# Altium PCB Heater.PcbDoc
Units mil, origin at the board's own origin, x right, y up, seen from the top; angles counter-clockwise.
Board outline 3665 x 3430 mil, 4 copper layers (Top Layer, GND, VCC, Bottom Layer), stack 23.756 mil thick; 83 components, 58 nets, 285 pads, 71 vias.
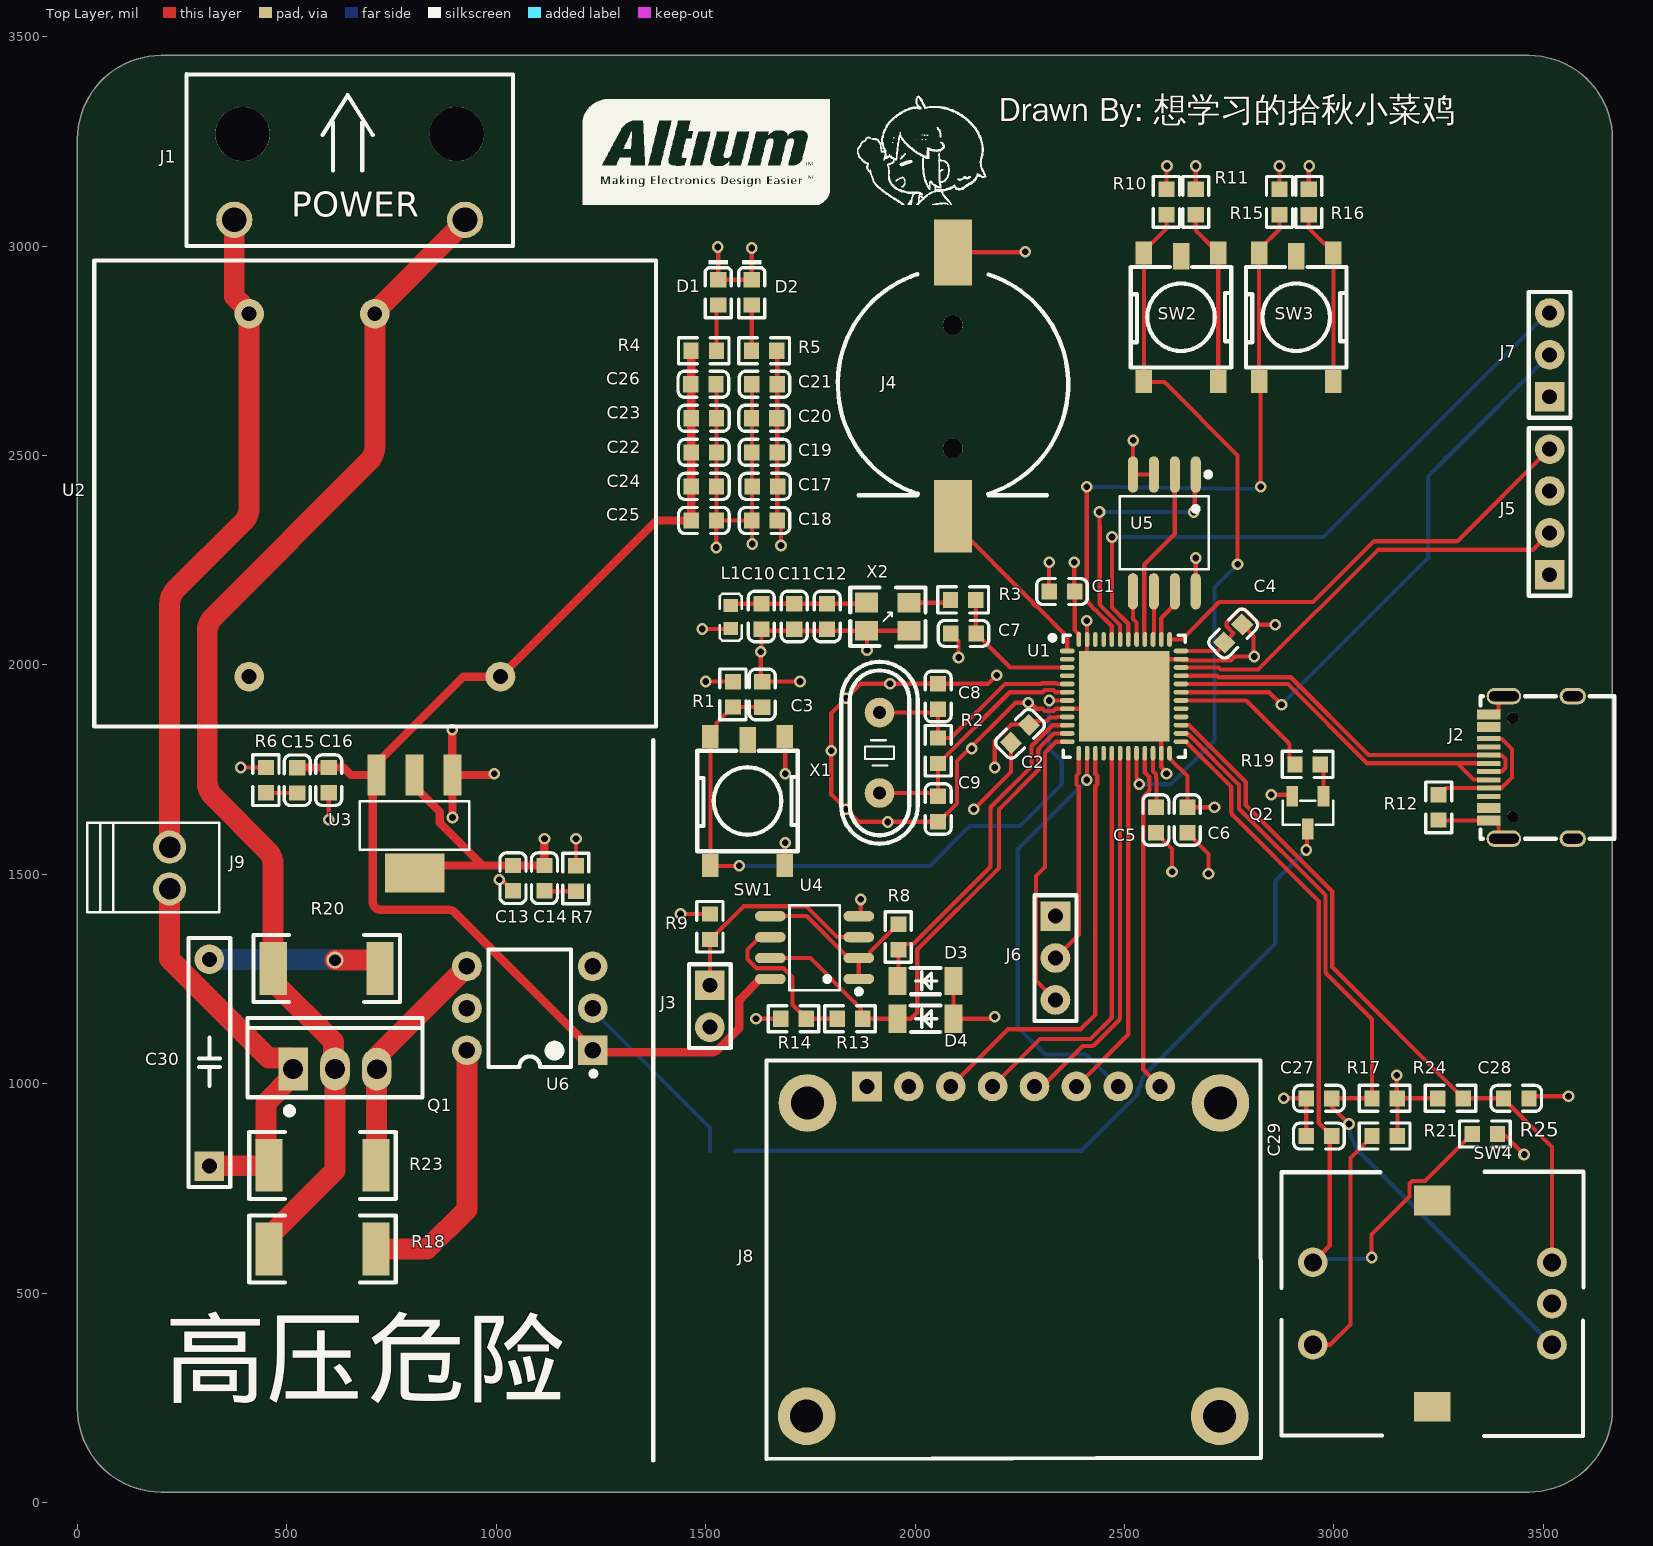
[diagram p0: Top Layer view]
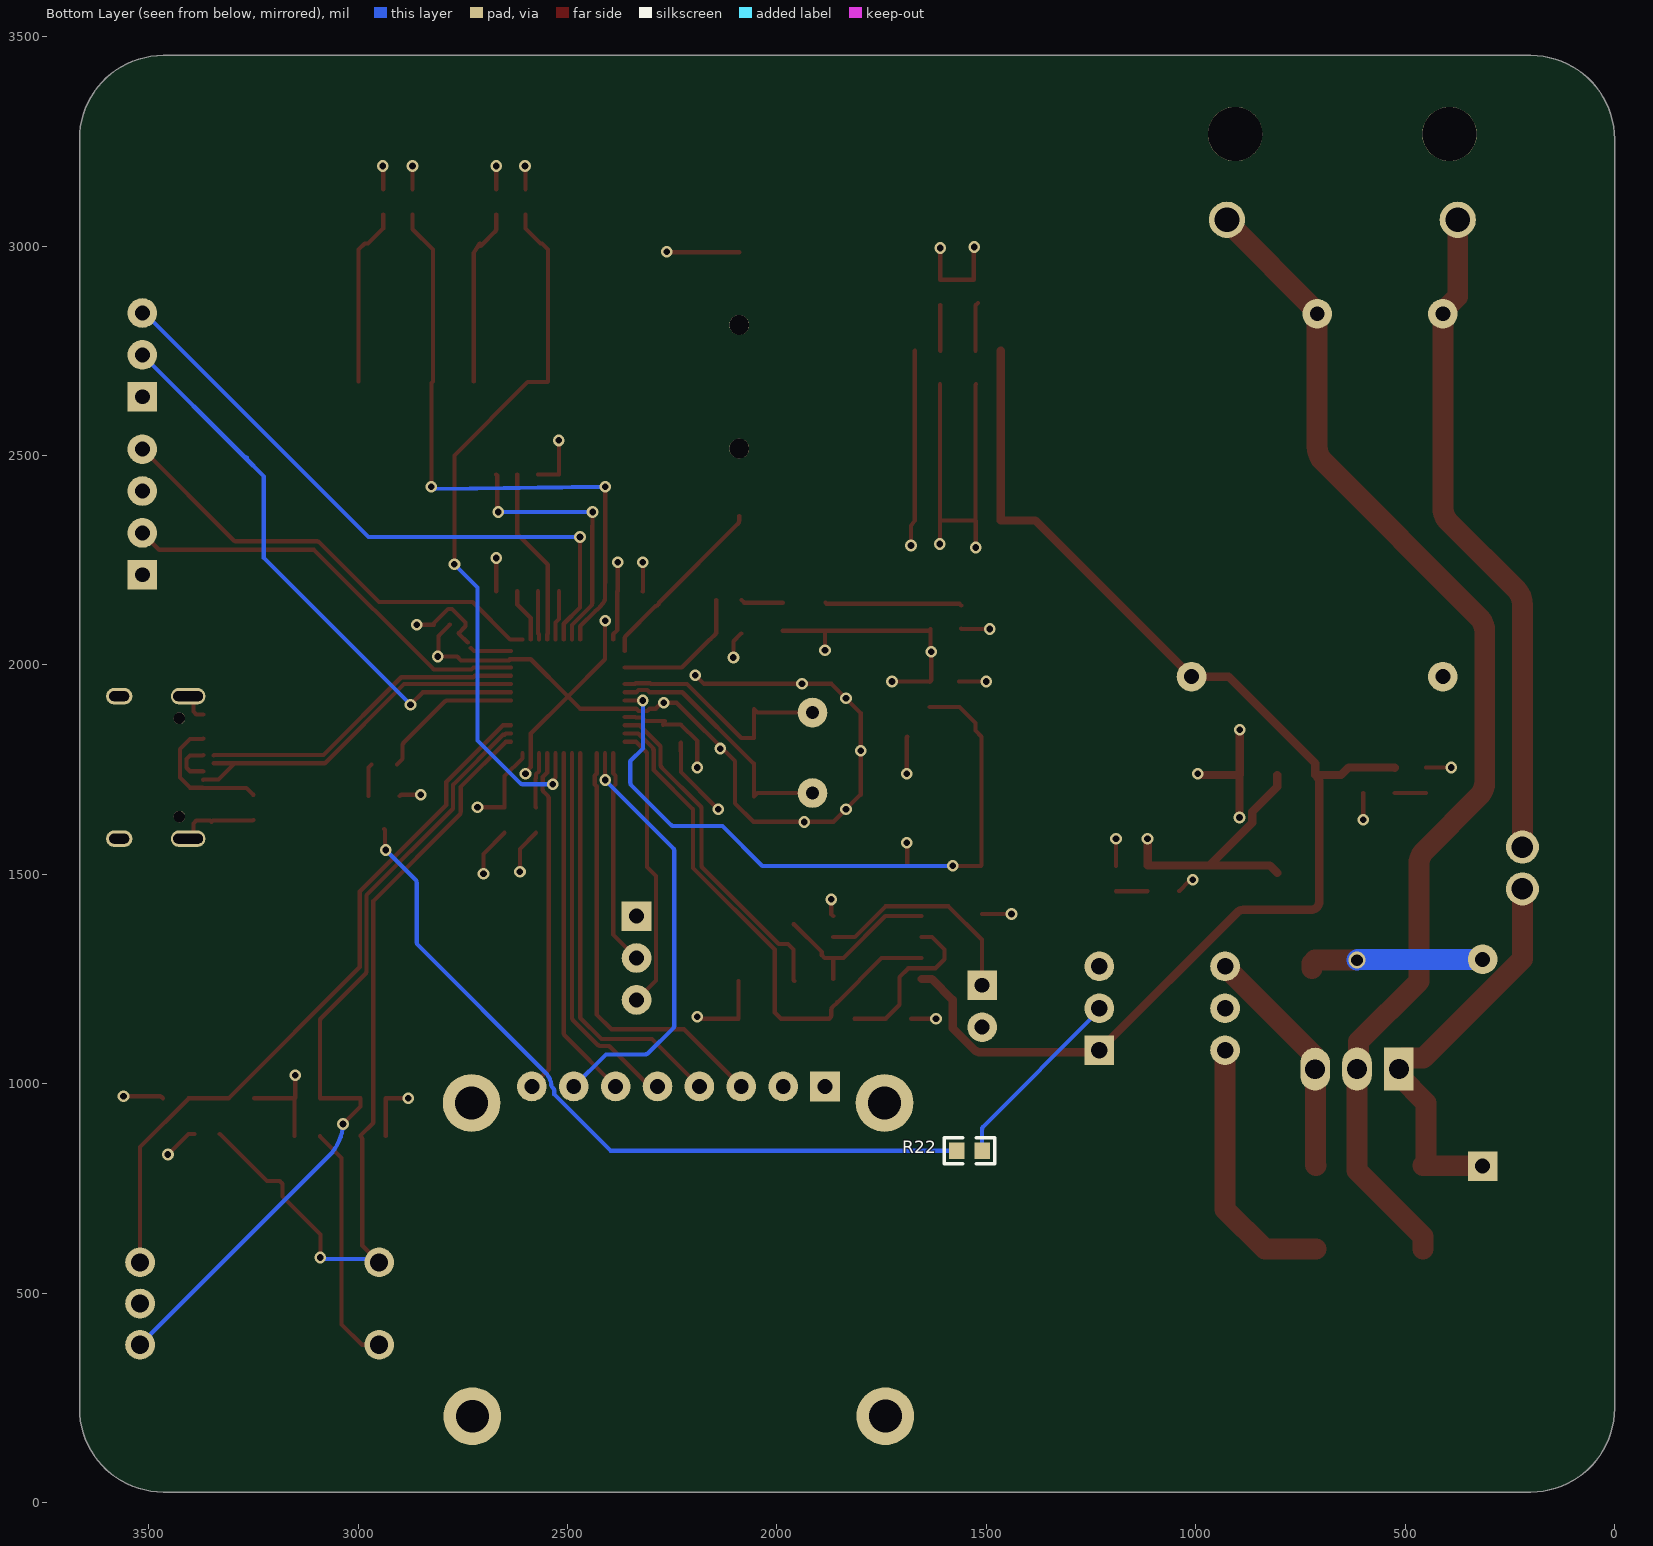
[diagram p1: Bottom Layer view, seen from below]
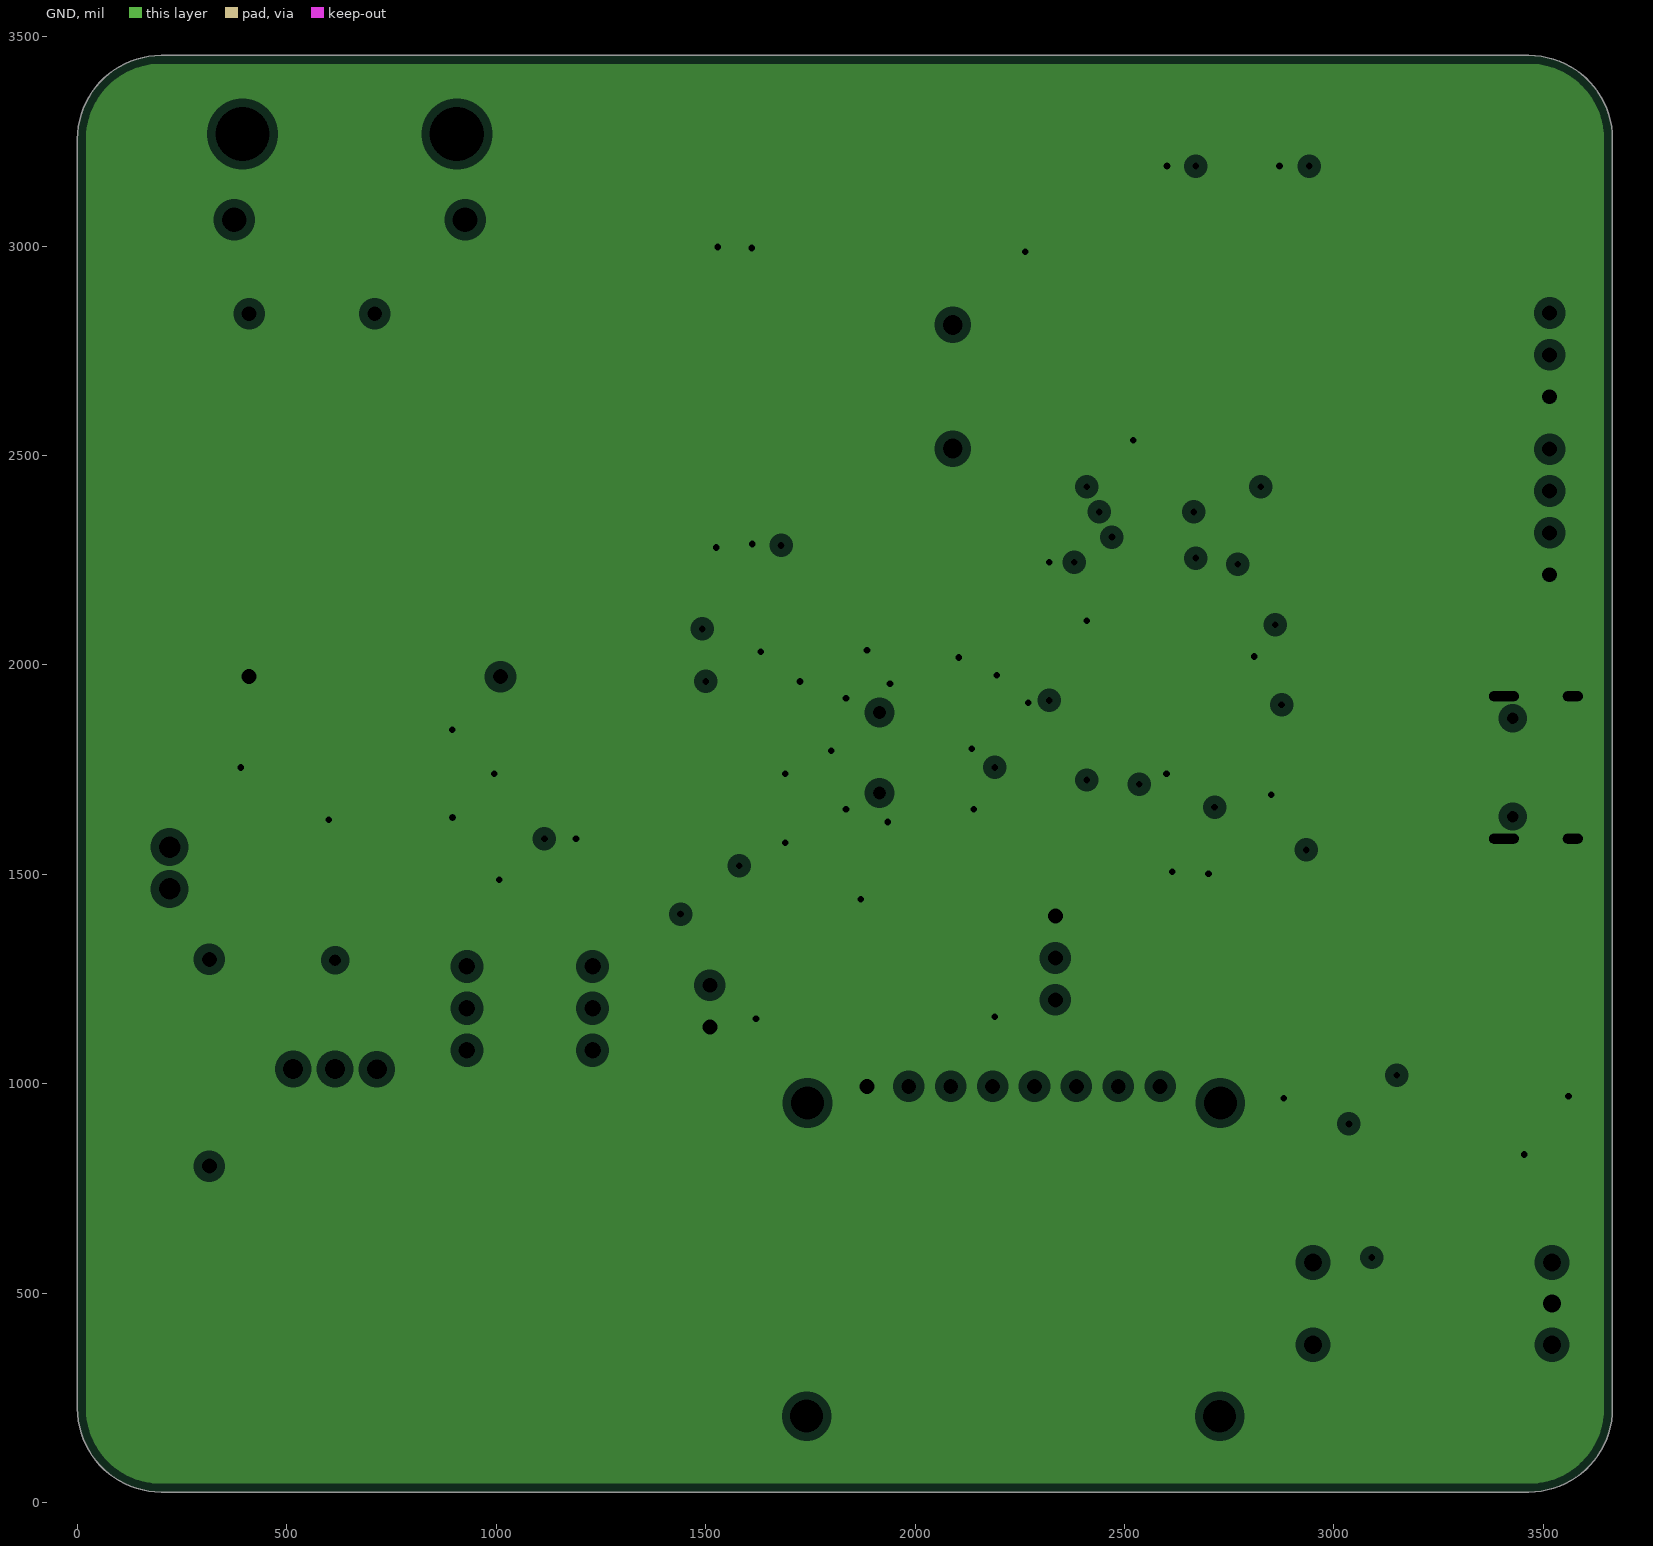
[diagram p2: GND, clearances drawn from the general rule]
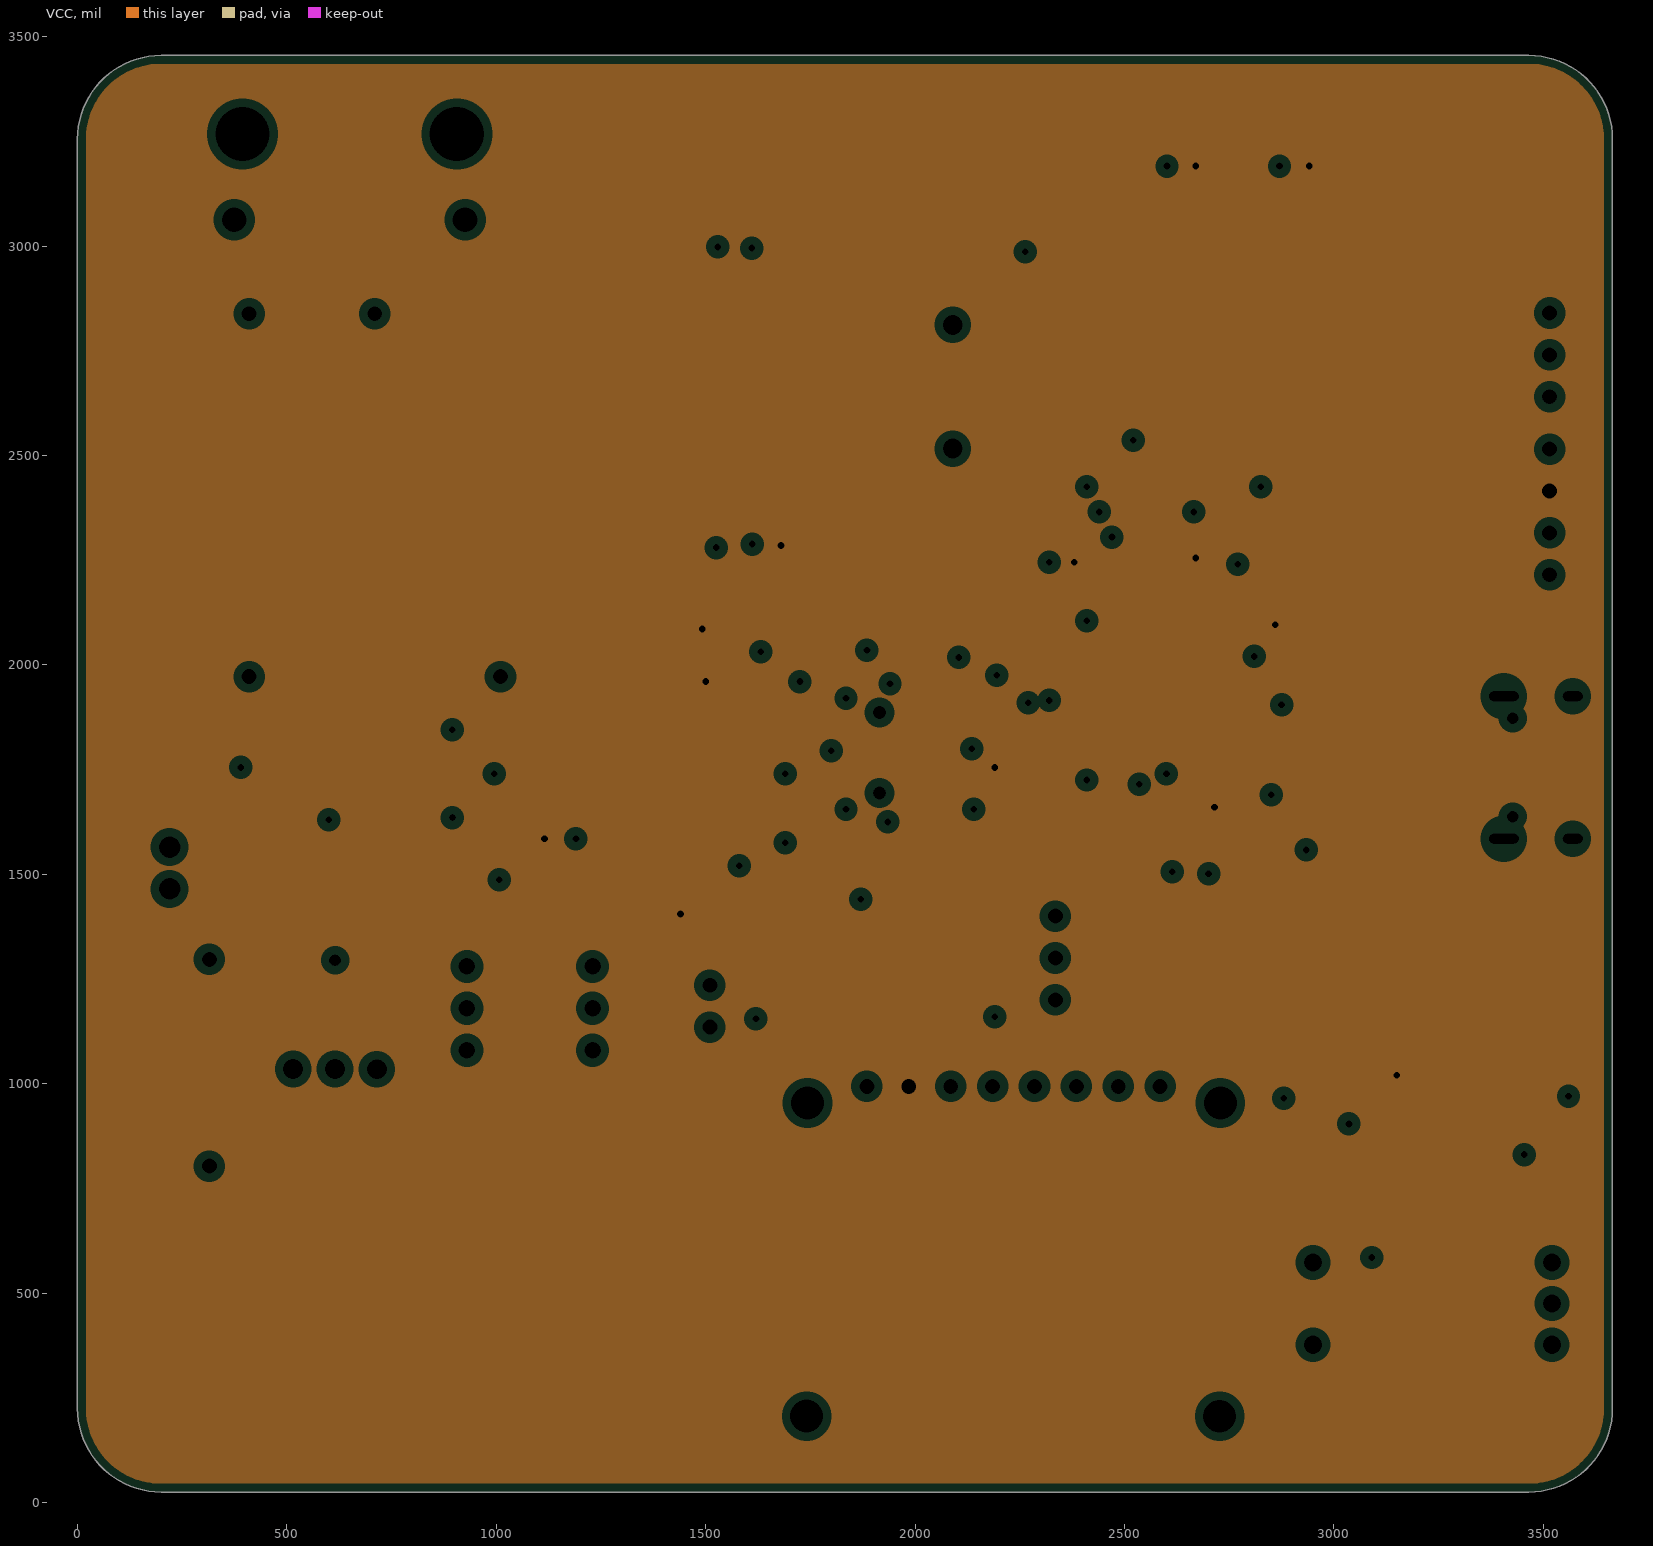
[diagram p3: VCC, clearances drawn from the general rule]
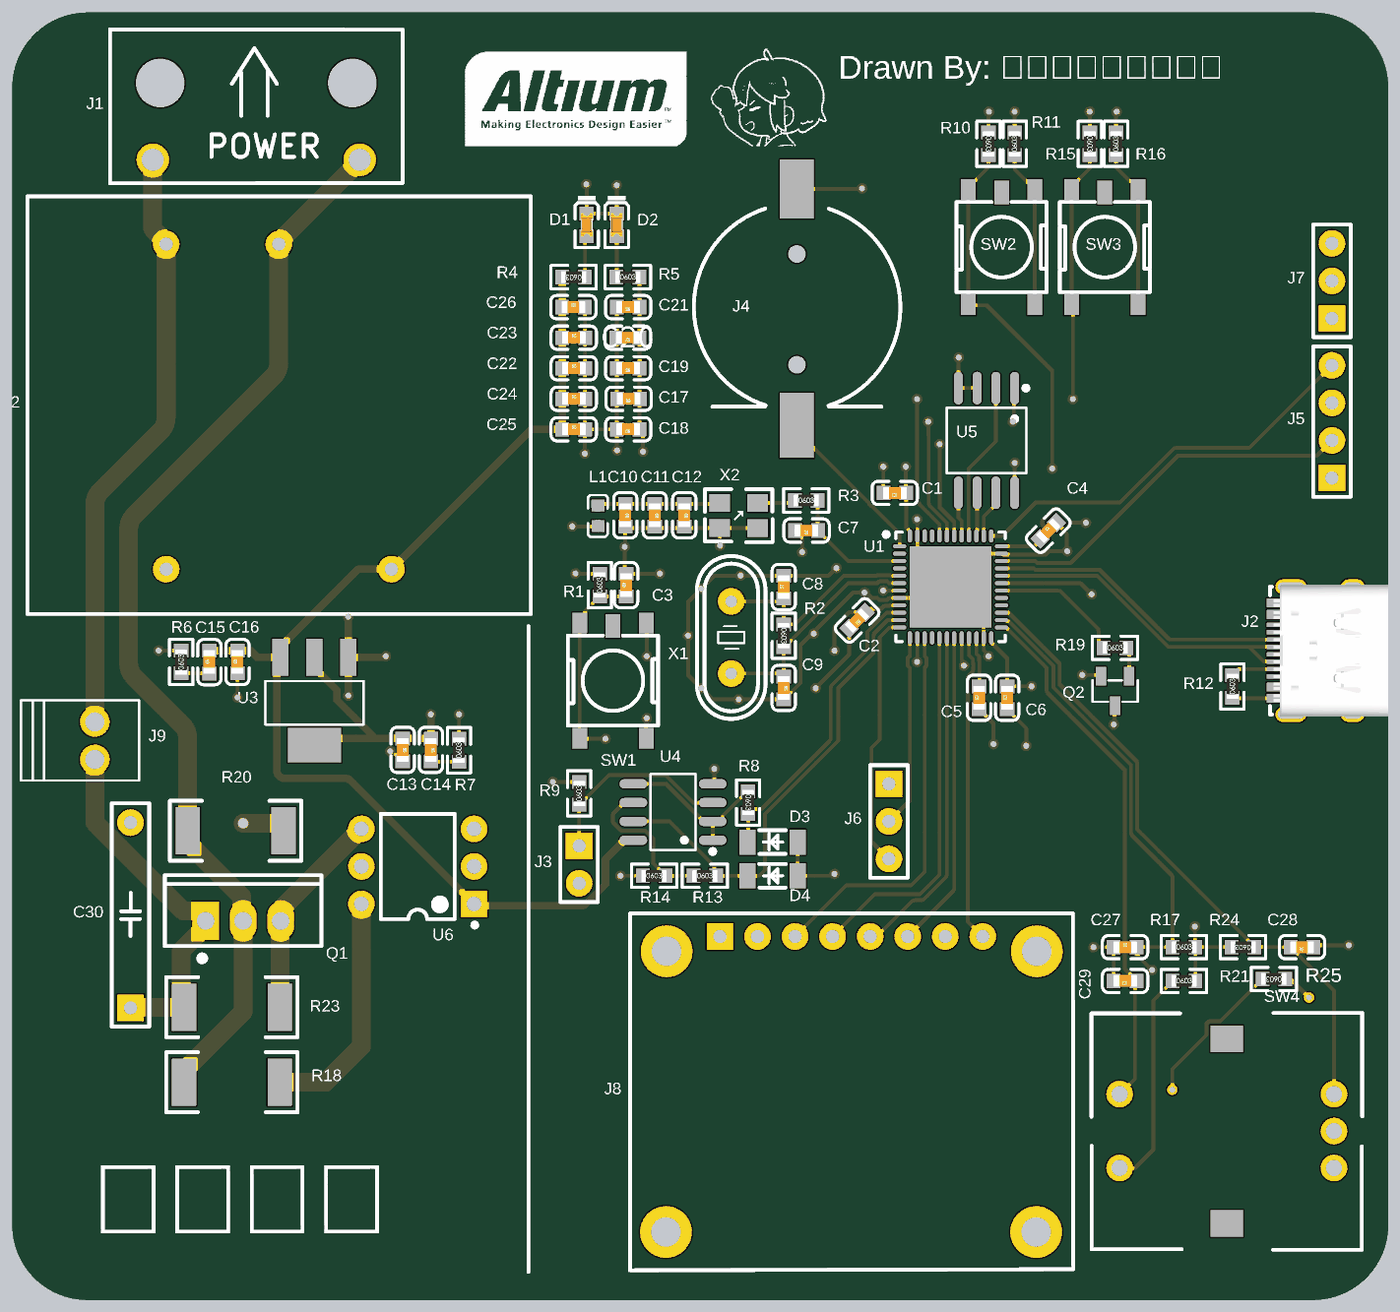
[diagram p4: 3D render of the assembled board from above, using the file's embedded part models]

## Layer stack, top to bottom
Top Solder: solder mask 0.4, Solder Resist, Dk 3.5
Top Layer: signal copper 1.4
Dielectric 2: prepreg 2.8, PP-006, Dk 4.1
GND: plane copper 1.378, net GND
Dielectric 1: dielectric 12.6, FR-4, Dk 4.8
VCC: plane copper 1.378, net +3.3V
Dielectric 3: prepreg 2.8, PP-006, Dk 4.1
Bottom Layer: signal copper 1.4
Bottom Solder: solder mask 0.4, Solder Resist, Dk 3.5

## Board outline
0,225 0,3255 cw(c200,3255) 200,3455 3465,3455 cw(c3465,3255) 3665,3255 3665,225 cw(c3465,225) 3465,25 200,25 cw(c200,225)

## Design rules (kind name [scope] priority, off if disabled: settings)
Clearance [All] p1: gap=6 ignorepadtopadclearanceinfootprint=FALSE
DiffPairsRouting [All] p1: maxlimit=10 minlimit=5 mostfreqgap=10 toplayer_minwidth=5 toplayer_maxwidth=15 toplayer_prefwidth=15 bottomlayer_minwidth=5 bottomlayer_maxwidth=15 bottomlayer_prefwidth=15 maxuncoupledlength=500
HoleSize [All] p1: absolutevalues=TRUE maxlimit=248.03 minlimit=7.87 maxpercent=80.000 minpercent=20.000
MinimumSolderMaskSliver [All] p1: minsoldermaskwidth=0.5
PlaneClearance [All] p1: clearance=20
PlaneConnect [All] p1: planeconnectstyle=Relief reliefexpansion=20 reliefentries=4 reliefconductorwidth=10 reliefairgap=10
PolygonConnect [All] p1: connectstyle=Relief reliefconductorwidth=10 reliefentries=4 polygonreliefangle="90 Angle" airgapwidth=10
RoutingVias [All] p1: holewidth=16 width=28 viastyle="Through Hole" minholewidth=12 minwidth=25 maxholewidth=48 maxwidth=40
SilkToSilkClearance [All] p1: silktosilkclearance=1
SilkToSolderMaskClearance [IsPad] p1: minsilkscreentomaskgap=0.9 clearancetoexposedcopper=TRUE
SolderMaskExpansion [All] p1: expansion=4 istentingtop=FALSE
Width [All] p1: maxlimit=50 minlimit=5 preferedwidth=10
23 further rules are at their usual default settings.

## Components (designator, comment, footprint, x,y, rotation, side; value= is the part's Value field where it differs from the comment)
C1 "100nF" 0603_C 2350,2175 r180 top
C2 "100nF" 0603_C 2250,1835 r225 top
C3 "100nF" 0603_C 1635,1930 r90 top
C4 "100nF" 0603_C 2760,2075 r45 top
C5 "2.2uF" 0603_C 2575,1630 r90 top
C6 "100nF" 0603_C 2650,1630 r90 top
C7 "20pF" 0603_C 2115,2075 r180 top
C8 "20pF" 0603_C 2055,1925 r90 top
C9 "20pF" 0603_C 2055,1655 r270 top
C10 "1uF" 0603_C 1632.89,2115 r270 top
C11 "100nF" 0603_C 1711.44,2115 r270 top
C12 "10nF" 0603_C 1790,2115 r270 top
C13 "100nF" 0603_C 1040,1490 r270 top
C14 "10uF" 0603_C 1115,1490 r270 top
C15 "10uF" 0603_C 525,1725 r90 top
C16 "100nF" 0603_C 600,1725.31 r90 top
C17 "100nF" 0603_C 1641.19,2425.98 r180 top
C18 "100nF" 0603_C 1640,2344.64 r180 top
C19 "100nF" 0603_C 1640,2507.32 r180 top
C20 "100nF" 0603_C 1639.06,2588.66 r180 top
C21 "10uF" 0603_C 1640,2670 r180 top
C22 "100nF" 0603_C 1496.25,2507.32 r0 top
C23 "100nF" 0603_C 1496.25,2588.66 r0 top
C24 "100nF" 0603_C 1496.25,2425.98 r0 top
C25 "100nF" 0603_C 1496.25,2344.64 r0 top
C26 "10uF" 0603_C 1495,2670 r0 top
C27 "10nF" 0603_C 2964.69,965 r0 top
C28 "10nF" 0603_C 3434.69,965 r180 top
C29 "10nF" 0603_C 2963.45,875 r180 top
C30 "10nF,400V" "2PIN - BigCap" 315,1050 r90 top
D1 "LED" 0603_LED 1530,2890 r270 top
D2 "LED" 0603_LED 1610,2890 r270 top
D3 "ZMM2V0" LL-34_L3.5-W1.5-RD 2025,1245 r0 top
D4 "ZMM2V0" LL-34_L3.5-W1.5-RD 2025,1155 r0 top
J1 "2Pin_Power" Power-AC-2Pin 650,3165 r0 top
J2 "Type_C_16Pin" USB-C-SMD_TYPEC-304-BCP16 3470,1755 r90 top
J3 "NTC" 2PIN 1510,1185 r270 top
J4 "BAT_" VBAT 2090,2670 r270 top
J5 "SWD" 4PIN 3515,2365 r90 top
J6 "UART_OUT" 3Pin 2335,1300 r270 top
J7 "UART_OUT" 3Pin 3515,2740 r90 top
J8 "IPS" IPS_8PIN 2235,580 r0 top
J9 "2PIn_To_Heater" CONN-TH_2.54-2P 220,1515 r270 top
L1 "0Ω" L0603 1560,2114.11 r90 top
Q1 "BT138-600E" TO-220-3_L10.0-W4.5-P2.54-L 615,1034.81 r0 top
Q2 "2N7002K_C2931745" SOT-23-3_NMOS 2937.68,1647.32 r90 top
R1 "4.7kΩ" "0603 _R" 1565,1930 r90 top
R2 "1MΩ" "0603 _R" 2055,1794.53 r270 top
R3 "33Ω" "0603 _R" 2115,2155 r0 top
R4 "1kΩ" "0603 _R" 1495,2750 r180 top
R5 "1kΩ" "0603 _R" 1640,2750 r0 top
R6 "1Ω" "0603 _R" 450,1725 r90 top
R7 "1Ω" "0603 _R" 1190,1490 r90 top
R8 "1kΩ" "0603 _R" 1960,1350 r270 top
R9 "130kΩ" "0603 _R" 1510,1375 r90 top
R10 "10kΩ" "0603 _R" 2600,3105 r270 top
R11 "1kΩ" "0603 _R" 2670,3105.63 r90 top
R12 "5.1kΩ" "0603 _R" 3250,1660 r90 top
R13 "20kΩ" "0603 _R" 1845,1155 r0 top
R14 "1kΩ" "0603 _R" 1710,1155 r0 top
R15 "10kΩ" "0603 _R" 2870,3105 r270 top
R16 "1kΩ" "0603 _R" 2940,3105.63 r90 top
R17 "1kΩ" "0603 _R" 3121.47,965 r0 top
R18 "360Ω,2512" 2512_R 585,605 r0 top
R19 "10Ω" "0603 _R" 2937.68,1762.32 r0 top
R20 "39Ω,2512" 2512_R 595,1275 r0 top
R21 "1kΩ" "0603 _R" 3121.47,875 r0 top
R22 "100Ω" "0603 _R" 1540,840 r180 bottom
R23 "360Ω,2512" 2512_R 585,805 r180 top
R24 "1kΩ" "0603 _R" 3277.92,965 r180 top
R25 "10kΩ" "0603 _R" 3360,880 r180 top
SW1 "SW" SW-SMD_5P-L6.4-W6.2-P4.50-LS8.2-TL 1600.01,1674.9 r90 top
SW2 "SW" SW-SMD_5P-L6.4-W6.2-P4.50-LS8.2-TL 2635,2830 r90 top
SW3 "SW" SW-SMD_5P-L6.4-W6.2-P4.50-LS8.2-TL 2910,2830 r90 top
SW4 "EC11" EC11 3235,475 r90 top
U1 "STM32F401CCU6" UFQFPN-48_L7.0-W7.0-P0.50-BL-EP 2499.21,1924.81 r270 top
U2 "AC_DC" AC_TO_DC 710,2405 r270 top
U3 "AMS117-3.3V" SOT-223-3_L6.5-W3.4-P2.30-LS7.0-BR 805,1620 r90 top
U4 "OP" SOP-8_OP 1760,1325 r90 top
U5 "MX25L8006EM2I-12G" SOP-8_L5.3-W5.3-P1.27-LS8.0-BL 2595,2315 r180 top
U6 "MOC3041SR2M" DIP-6_MO 1080,1180 r90 top
X1 "25MHz" "HC-49US_L11.0-W4.6-P4.88 - duplicate" 1915,1790 r270 top
X2 "32768Hz" "OSC 3225" 1935,2115 r0 top

## Footprints (in the part's own frame and the unit in brackets; to place one, negate y for a bottom-side part, rotate by r counter-clockwise, add the part's x,y. Pads: shape width x height; smd on the part's side, far side on the other; paste and mask are expansions set on the pad)
2PIN [mm]
  rect 1.8x1.8 hole 0.9: 1(-1.27,0)
  round 1.8 hole 0.9: 2(1.27,0)
  silkscreen extent -2.54,-1.27 2.54,1.27
"2PIN - BigCap" [mm]
  rect 1.8x1.8 hole 0.9: 1(-6.27,0)
  round 1.8 hole 0.9: 2(6.27,0)
  silkscreen extent -7.54,-1.27 7.57,1.27
3Pin [mm]
  rect 1.8x1.8 hole 0.9: 1(-2.54,0)
  round 1.8 hole 0.9: 2(0,0) 3(2.54,0)
  silkscreen extent -3.81,-1.27 3.81,1.27
4PIN [mm]
  rect 1.8x1.8 hole 0.9: 1(-3.81,0)
  round 1.8 hole 0.9: 2(-1.27,0) 3(1.27,0) 4(3.81,0)
  silkscreen extent -5.08,-1.27 5.08,1.27
"0603 _R" [mm]
  rect 0.93x0.98 smd: 1(-0.778,0) 2(0.762,0)
  silkscreen extent -1.54,-0.79 1.53,0.79, body extent -0.86,-0.4 0.84,0.4, height 0.56
0603_C [mm]
  rect 0.93x0.98 smd: 1(-0.786,0) 2(0.754,0)
  silkscreen extent -1.55,-0.79 1.52,0.79, body extent -0.82,-0.4 0.78,0.4, height 0.3
0603_LED [mm]
  rect 0.93x0.98 smd: A(0.787,0) K(-0.753,0)
  silkscreen extent -1.96,-0.79 1.55,0.79, body extent -0.78,-0.4 0.82,0.4, height 0.6
2512_R [mm]
  rect 1.65x3.2 smd mask+0.102: 1(-3.24,0) 2(3.24,0)
  silkscreen extent -4.44,-2.03 4.44,2.03
AC_TO_DC [mm]
  round 1.8 hole 0.9: 1(-11,-7.62) 2(-11,0) 3(11,-7.62) 4(11,7.62)
  silkscreen extent -14.23,-17.02 14.03,17.05
CONN-TH_2.54-2P [mm]
  round 2 hole 1.3: 1(-1.27,0) 2(1.27,0)
  silkscreen extent -2.73,-5 2.7,3
DIP-6_MO [mm]
  rect 1.8x1.8 hole 1: 1(-2.54,-3.81)
  round 1.8 hole 1: 2(0,-3.81) 3(2.54,-3.81) 4(2.54,3.81) 5(0,3.81) 6(-2.54,3.81)
  silkscreen extent -4.11,-4.01 3.56,2.5
EC11 [mm]
  round 1.8 hole 1.1: 1(-2.5,-7.25) 2(0,-7.25) 3(2.5,-7.25) 4(2.5,7.25) 5(-2.5,7.25)
  rect 1.8x2.2 smd: ""(-6.25,0) ""(6.25,0)
  silkscreen extent -8.04,-9.16 7.99,9.16
"HC-49US_L11.0-W4.6-P4.88 - duplicate" [mm]
  round 1.8 hole 0.8: 1(-2.44,0) 2(2.44,0)
  silkscreen extent -5.51,-2.32 5.51,2.32
IPS_8PIN [mm]
  rect 1.8x1.8 hole 0.9: 1(-8.89,10.5)
  round 1.8 hole 0.9: 2(-6.35,10.5) 3(-3.81,10.5) 4(-1.27,10.5) 5(1.27,10.5) 6(3.81,10.5) 7(6.35,10.5) 8(8.89,10.5)
  round 3.5 hole 2 unplated: ""(-12.544,-9.498) ""(-12.5,9.5) ""(12.5,-9.5) ""(12.544,9.498)
  silkscreen extent -14.98,-12.09 15.01,12.06
L0603 [mm]
  rect 0.8x0.864 smd: 1(-0.7,0) 2(0.7,0)
  silkscreen extent -1.42,-0.65 1.41,0.67
LL-34_L3.5-W1.5-RD [mm]
  rect 1.1x1.7 smd: 1(-1.7,0) 2(1.7,0)
  silkscreen extent -0.9,-0.8 0.9,0.8
"OSC 3225" [mm]
  rect 1.4x1.2 smd mask+0.102: 1(-1.291,-0.848) 2(1.291,-0.852) 3(1.291,0.848) 4(-1.291,0.852)
  silkscreen extent -2.29,-1.8 2.29,1.78
Power-AC-2Pin [mm]
  round 2.2 hole 1.5: 1(-7,-2.6) 2(7,-2.6)
  round 3.3 hole 3.3 unplated: ""(-6.5,2.6) ""(6.5,2.6)
  silkscreen extent -9.9,-4.19 9.91,6.22
SOP-8_L5.3-W5.3-P1.27-LS8.0-BL [mil]
  oval 23.98x86.79 smd: 1(-75,-139.46) 2(-25,-139.46) 3(25,-139.46) 4(75,-139.46) 5(75,139.46) 6(25,139.46) 7(-25,139.46) 8(-75,139.46)
  silkscreen extent -111,-145 106,87
SOP-8_OP [mm]
  oval 0.63x1.865 smd: 1(-1.905,-2.682) 2(-0.635,-2.682) 3(0.635,-2.682) 4(1.905,-2.682) 5(1.905,2.682) 6(0.635,2.682) 7(-0.635,2.682) 8(-1.905,2.682)
  silkscreen extent -2.82,-2.83 2.58,1.52
SOT-23-3_NMOS [mm]
  rect 1.25x0.7 smd: 1(1,-0.95) 2(1,0.95) 3(-1,0)
  silkscreen extent -0.73,-1.53 0.73,1.53
SOT-223-3_L6.5-W3.4-P2.30-LS7.0-BR [mm]
  rect 2.5x1.1 smd: 1(2.97,-2.3) 2(2.97,0) 3(2.97,2.3)
  rect 2.34x3.6 smd: 2(-2.97,0)
  silkscreen extent -1.57,-3.33 1.37,3.33
SW-SMD_5P-L6.4-W6.2-P4.50-LS8.2-TL [mm]
  rect 1.4x1 smd: 1(-3.9,2.25) 1(3.9,2.25) 2(-3.9,-2.25) 2(3.9,-2.25)
  rect 1.6x1 smd: ""(3.7,0)
  silkscreen extent -3.05,-3.05 3.05,3.05
TO-220-3_L10.0-W4.5-P2.54-L [mm]
  rect 1.8x2.6 hole 1.2: 1(-2.54,0.005)
  oval 1.8x2.6 hole 1.2: 2(0,0.005) 3(2.54,-0.005)
  silkscreen extent -5.3,-2.73 5.3,3.09
UFQFPN-48_L7.0-W7.0-P0.50-BL-EP [mm]
  oval 0.28x0.9 smd: 1(-2.751,-3.449) 2(-2.25,-3.449) 3(-1.75,-3.449) 4(-1.25,-3.449) 5(-0.749,-3.449) 6(-0.249,-3.449) 7(0.249,-3.449) 8(0.749,-3.449) 9(1.25,-3.449) 10(1.75,-3.449) 11(2.251,-3.449) 12(2.751,-3.449) 25(2.751,3.449) 26(2.251,3.449) 27(1.75,3.449) 28(1.25,3.449) 29(0.749,3.449) 30(0.249,3.449) 31(-0.249,3.449) 32(-0.749,3.449) 33(-1.25,3.449) 34(-1.75,3.449) 35(-2.25,3.449) 36(-2.751,3.449)
  oval 0.9x0.28 smd: 13(3.449,-2.751) 14(3.449,-2.25) 15(3.449,-1.75) 16(3.449,-1.25) 17(3.449,-0.749) 18(3.449,-0.249) 19(3.449,0.249) 20(3.449,0.749) 21(3.449,1.25) 22(3.449,1.75) 23(3.449,2.25) 24(3.449,2.751) 37(-3.449,2.751) 38(-3.449,2.25) 39(-3.449,1.75) 40(-3.449,1.25) 41(-3.449,0.749) 42(-3.449,0.249) 43(-3.449,-0.249) 44(-3.449,-0.749) 45(-3.449,-1.25) 46(-3.449,-1.75) 47(-3.449,-2.25) 48(-3.449,-2.751)
  rect 5.5x5.5 smd: 49(0,0)
  silkscreen extent -3.7,-4.5 3.7,3.7
USB-C-SMD_TYPEC-304-BCP16 [mm]
  oval 1x2.1 hole 0.6 slot 1.8 at 90 deg: 13(-4.32,1.633) 14(4.32,1.633)
  oval 1x1.6 hole 0.6 slot 1.2 at 90 deg: 15(-4.32,-2.547) 16(4.32,-2.547)
  rect 0.6x1.45 smd: A1B12(-3.225,2.547) A4B9(-2.45,2.547) B1A12(3.22,2.547) B4A9(2.45,2.547)
  rect 0.3x1.45 smd: A5(-1.25,2.547) A6(-0.25,2.547) A7(0.25,2.547) A8(1.25,2.547) B5(1.75,2.547) B6(0.75,2.547) B7(-0.75,2.547) B8(-1.75,2.547)
  round 0.7 hole 0.7 unplated: ""(-2.98,1.102) ""(2.98,1.102)
  silkscreen extent -4.32,-5.08 4.32,3.05, body extent -4.48,-4.95 4.48,2.8, height 3.26
VBAT [mm]
  rect 4.4x2.3 smd mask+0.102: 1(8,0)
  rect 4x2.3 smd mask+0.102: 2(-8,0)
  round 1.2 hole 1.2 unplated: ""(-3.6,0) ""(3.9,0)
  silkscreen extent -6.67,-6.97 6.73,7

## Part data
C1 C2 C3 C4 C5 C6 C7 C8 C9 C10 C11 C12 C13 C14 C15 C16 C17 C18 C19 C20 C21 C22 C23 C24 C25 C26 C27 C28 C29 C30: library part Capacitor
D3 D4: BOM_JLCPCB Part Class="Extended Part", BOM_Manufacturer=SEMTECH, BOM_Manufacturer Part=ZMM2V0, BOM_Supplier=LCSC, BOM_Supplier Part=C8079, spicePre=D, spiceSymbolName=ZMM2V0
L1: BOM_JLCPCB Part Class="Extended Part", BOM_Manufacturer=FH, BOM_Manufacturer Part=CBW160808U000T, BOM_Supplier=LCSC, BOM_Supplier Part=C139173, nameAlias=Value, spicePre=L, spiceSymbolName=CBW160808U000T
Q2: BOM_Manufacturer=Doeshare（德芯), BOM_Manufacturer Part=2N7002K, BOM_Supplier=LCSC, BOM_Supplier Part=C2931745, Contributor=LCSC, spicePre=Q, spiceSymbolName=2N7002K_C2931745
R1 R2 R3 R4 R5 R6 R7 R8 R9 R10 R11 R12 R13 R14 R15 R16 R17 R18 R19 R20 R21 R22 R23 R24 R25: library part Resistor
U3: library part ASM1117-3.3V
U5: BOM_JLCPCB Part Class="Extended Part", BOM_Manufacturer=Micronix, BOM_Manufacturer Part=MX25L8006EM2I-12G, BOM_Supplier=LCSC, BOM_Supplier Part=C71947, spicePre=U, spiceSymbolName=MX25L8006EM2I-12G
X1: library part XTAL-2P, "2脚无源脚晶振", BOM名称=2脚无源脚晶振, 学习资源=www.ooocke.com, 版权归属=源创客
X2: library part XTAL-ACT-4P, "4脚有源晶振", BOM名称=4脚有源晶振, 学习资源=www.ooocke.com, 版权归属=源创客

## Via types
v1: diameter 28, hole 16, Top Layer to Bottom Layer, tented both sides, 68 vias
v2: diameter 28, hole 16, Top Layer to Bottom Layer, 2 vias
v3: diameter 40, hole 28, Top Layer to Bottom Layer, tented both sides, 1 vias

## Nets (pads, with @x,y where several pads share a name; then routed paths per layer and width w, separated by ;. In a path a pad name is that pad's centre, name@x,y a point inside that pad or via, vN(x,y) a via of type N, cw(c..) or ccw(c..) an arc to the next point about the centre after c; other vN are vias at no path point)
+3.3V: C1.1 C2.1 C4.1 C6.2 C13.1 C14.1 C17.1 C18.1 C19.1 C20.1 C21.1 J5.3 J8.2 L1.1 R1.2 R5.2 R9.2 R11.2 R16.2 R17.2 R21.2 R24.2 U1.9 U1.24 U1.36 U1.48 U3.2 U5.8 | length 2737.3
  Top Layer w10: v1(1440,1405) R9.2 ; v1(1491.56,2085.81) 1559.24,2085.81 L1.1 ; v1(1500.21,1960.42) 1500.63,1960 R1.2 ; R5.2 1670.94,2749.06 C19.1 1670.94,2425.98 C18.1 1680,2330.35 v1(1680,2285) ; v1(2190,1755) 2190,1817.84 2229.73,1857.57 2271.18,1857.57 C2.1 ; C2.1@2267.57,1866.18 2313.94,1866.18 2321.76,1874 2336.98,1874 2338.58,1875.6 U1.9 ; v1(2380,2245) 2380,2175.94 C1.1 2380.94,2083.05 2390.91,2073.08 U1.48 ; U1.24 2607.51,1776.8 2650,1734.3 C6.2 2650.31,1660 v1(2715,1660) ; U1.36 2723.1,2033.1 C4.1@2729.04,2039.04 ; U5.8 v1(2670,2255) ; R11.2 v1@2670,3190 ; C4.1@2730,2040 C4.1@2730.98,2040 ; C4.1 2760.27,2075.27 2743.41,2092.14 2743.41,2101.25 2775.74,2133.58 2784.86,2133.58 2818.58,2099.86 2818.58,2095.64 v1(2859.8,2095.64) ; R16.2 v1@2940,3186.89 ; v1@2940,3198.45 v1@2941.33,3199.78 ; v1(3150,1020) 3150,966.47 R17.2 ; R21.2 R17.2 ; R24.2 R17.2
  Top Layer w20: U3.2@805,1503.07 822.87,1520.94 967.21,1520.94 ; U3.2@805,1736.93 805,1709.37 865.29,1649.08 865.29,1622.86 967.21,1520.94 ; v1(1115,1585) C14.1 C13.1 967.21,1520.94
  other v1: 2670,3190.78 2941.33,3190.78
+5V: C15.2 C16.2 C22.1 C23.1 C24.1 C25.1 C26.1 R4.2 U2.4 U3.3 U4.8 U6.1 | length 3136.7
  Top Layer w20: C15.2 525.15,1754.85 599.85,1754.85 C16.2 635,1755 653.07,1736.93 705,1736.93 U3.3 ; R4.2 1465.16,2749.84 1465.16,2344.8 C25.1 1382.72,2344.64 U2.4 921.89,1971.93 714.45,1764.49 U3.3 ; U4.8 1630.08,1250 1580.23,1200.15 1580.23,1132.49 1528.6,1080.86 cw(c1514.45,1095) 1514.45,1075 1255.43,1075 U6.1 900.86,1409.14 ccw(c886.72,1395) 886.72,1415 725,1415 cw(c725,1435) 705,1435 705,1719.19 cw(c725,1719.19) 710.86,1733.34 U3.3
ADC0: D3.1 R8.2 U1.10 | length 811.2
  Top Layer w10: D3.1 1960,1246.93 R8.2 1973.31,1333.31 1995.68,1333.31 2177.07,1514.7 ccw(c2170,1521.77) 2180,1521.77 2180,1655.86 cw(c2190,1655.86) 2182.93,1662.93 2275.11,1755.11 ccw(c2268,1762.14) 2278,1762.14 2278,1805.63 2328.27,1855.9 U1.10
ADC1: D4.1 R13.2 U1.11 U4.7 | length 1261.3
  Top Layer w10: U4.7 1750,1300 1855.73,1194.27 1867.09,1182.91 cw(c1860,1175.86) 1870,1175.86 1870,1164.14 ccw(c1880,1164.14) 1872.93,1157.07 R13.2 D4.1 1990,1155 2005,1170 2005,1320 2200,1515 2200,1655 2294,1749 2294,1796.63 2295,1797.63 2295,1800 2331,1836 2363.2,1836 U1.11
BOOT0: R15.2 SW3.1 U1.44 | length 1476.3
  Top Layer w10: v1(2410,2425) 2410,2197.44 ccw(c2420,2197.48) 2410.11,2196 cw(c2399.24,2194.29) 2410.24,2194.29 2410.24,2158.42 ccw(c2420.24,2158.47) 2411.55,2153.53 2411.57,2153.48 ccw(c2487.03,2196.85) 2434.03,2127.82 2469.71,2092.14 U1.44 ; v1(2825,2425) 2825,2672.87 2821.41,2676.46 2821.41,2983.54 2821.41,2991.42 2870,3040 R15.2
  Bottom Layer w10: v1(2410,2425) 2815.76,2420.05 ccw(c2815.91,2430.05) 2822.98,2422.98 v1(2825,2425)
BOOT1: R10.2 SW2.1 U1.20 | length 1721.4
  Top Layer w10: U1.20 2528.71,1730.26 2531.6,1727.36 cw(c2524.53,1720.29) 2534.5,1721.11 v1(2535,1715) ; R10.2 2600,3041.69 2564.41,3006.1 2561.1,3006.1 2546.41,2991.42 2546.41,2983.54 2546.41,2676.46 2547.87,2675 2595,2675 2770,2500 v1(2770,2240)
  Bottom Layer w10: v1(2535,1715) 2606.21,1715 ccw(c2606.21,1725) 2613.28,1717.93 2715,1819.64 2715,2185 v1(2770,2240)
EC11_A: C27.2 R17.1 SW4.1 U1.26 | length 1966.3
  Top Layer w10: U1.26 2647.48,1836.2 2650.67,1833.01 2654.04,1833.01 2773.52,1713.53 2773.52,1656.48 2979.94,1450.06 2979.94,1269.14 ccw(c2989.94,1269.21) 2982.82,1262.18 3087.91,1157.09 cw(c3080.84,1150.02) 3090.84,1150.06 ; v1(3035.76,903.9) 2994.39,945.27 C27.2 R17.1 3090.84,1150.02
  Bottom Layer w10: v1(3035.76,903.9) ccw(c3150.67,909.01) 3068.8,828.21 SW4.1
EC11_C: C28.2 R24.1 SW4.3 U1.27 | length 1716.7
  Top Layer w10: U1.27 2635.2,1855.7 2653.98,1855.7 2789.52,1720.16 2789.52,1665.48 2995.94,1459.06 2995.94,1278.6 3308.55,965.98 R24.1 C28.2 3405,964.02 3520.43,848.58 SW4.3
EC11_SW: C29.1 R25.2 SW4.4 U1.25 | length 1974.2
  Top Layer w10: U1.25 2647.2,1816.5 2755,1708.7 2755,1649.14 ccw(c2765,1649.14) 2757.91,1642.09 2963.55,1436.45 2963.55,906.82 2994.39,875.98 C29.1 2992.93,873.54 ccw(c3000,866.47) 2990,866.47 2990,613.86 SW4.4 ; v2(3090,585) 3090,640 3180.69,730.69 3180.69,761.05 3187.14,767.5 3217.5,767.5 R25.2
  Bottom Layer w10: SW4.4 2957.7,581.56 3086.56,581.56 v2(3090,585)
Flash_CLK: U1.39 U5.6 | length 115.7
  Top Layer w10: U1.39 2568.11,2073.08 2570,2074.98 U5.6
Flash_CS: U1.43 U5.1 | length 640.5
  Top Layer w10: v1(2440,2365) 2441,2303.53 cw(c2425,2303.27) 2441,2303.27 2441.03,2147.59 ccw(c2451.03,2147.59) 2443.92,2140.56 ; 2443.93,2140.55 2489.41,2095.07 U1.43 ; v1(2665,2365) 2667.5,2367.5 2667.5,2451.96 U5.1
  Bottom Layer w10: v1(2440,2365) v1(2665,2365)
Flash_Hold: U1.38 U5.7 | length 128.3
  Top Layer w10: U1.38 2587.81,2111.94 2620,2144.13 U5.7
Flash_MISO: U1.40 U5.2 | length 424.7
  Top Layer w10: U1.40 2548.41,2073.08 2547.01,2074.48 2547.01,2239.11 2620,2312.1 U5.2
Flash_MOSI: U1.41 U5.5 | length 118.5
  Top Layer w10: U5.5 2520,2109.73 2528.71,2101.03 U1.41
GND: C1.2 C2.2 C3.2 C4.2 C5.1 C6.1 C7.2 C8.2 C9.2 C10.2 C11.2 C12.2 C13.2 C16.1 C17.2 C18.2 C19.2 C20.2 C21.2 C22.2 C23.2 C24.2 C25.2 C26.2 C27.1 C28.1 C29.2 D1.K D2.K D3.2 D4.2 J2.13 J2.14 J2.15 J2.16 J2.A1B12 J2.B1A12 J3.2 J4.2 J5.1 J6.1 J7.1 J8.1 Q2.2 R6.2 R7.2 R10.1 R12.1 R14.1 R15.1 R25.1 SW1.2 SW4.2 U1.8 U1.23 U1.35 U1.47 U1.49 U2.3 U3.1 U4.4 U5.3 U5.4 X2.1 X2.2 | length 6730.3
  Top Layer w10: v1(390,1755) R6.2 ; v1(600,1630) C16.1 ; v1(1006.9,1486.9) 1010.35,1483.46 1015.87,1483.46 1039.02,1460.31 C13.2 ; R7.2 1190,1584.79 v1(1190.2,1584.99) ; C26.2 1525.94,2668.75 C23.2 C22.2 C24.2 C25.2 ; v1(1525,2280) 1525,2343.7 C25.2 ; v1(1529.03,2997.71) 1530,2996.74 D1.K D2.K v1(1610,2995) ; C21.2 C19.2 C18.2 ; v1(1611.22,2288.33) 1610.31,2289.25 C18.2 ; v1(1620,1155) 1666.06,1155 R14.1 ; SW1.2@1688.59,1521.36 1688.59,1573.59 v1(1690,1575) ; SW1.2@1688.59,1828.44 1690,1827.03 v1(1690,1740) ; v1(1725,1960) 1635.31,1960 C3.2 1631.36,1963.34 v1(1631.36,2031.52) 1632.89,2033.05 C10.2 1636.59,2081.6 X2.1 X2.1@1884.32,2081.47 ; U4.4 1870,1404.39 v1(1870,1440) ; v1(1885,2035) 1885,2080.79 X2.1@1884.32,2081.47 ; X2.2 X2.1@1884.32,2081.47 ; C7.2 2103.85,2056.45 v1(2103.85,2017.71) ; J4.2 2261.82,2984.96 v1(2263.25,2986.39) ; D3.2 D4.2 2185,1155 v1(2190,1160) ; v1(2140,1655) 2229,1744 2229,1793.79 2229.7,1794.49 2229.7,1813.31 C2.2 ; v1(2195,1975) 2194.6,1975 2174.3,1954.69 C8.2 1869.69,1954.69 1800,1885 1800,1690 1864.69,1625.31 C9.2 2055.98,1625.31 2100,1669.32 2100,1770 2239.6,1909.6 v1(2270,1909.6) 2274.87,1909.6 2289.17,1895.3 2304.34,1895.3 2309.64,1890 2330.36,1890 2335.66,1895.3 U1.8 2469.71,1895.3 U1.49 ; v1(2320,2245) 2320,2175.31 C1.2 ; v1(2410,2105) 2410.61,2104.39 U1.47 2410.61,2013.4 U1.49 ; v1(2521.06,2535.89) 2520,2534.83 U5.4 U5.3 ; C5.1 2613.59,1560.47 v1(2613.59,1505.86) ; v1(2600,1740) 2600,1744.09 2587.81,1756.28 U1.23 2587.81,1836.2 U1.49 ; R10.1 v1@2600,3189.35 ; v1@2600,3198.35 v1@2601.43,3199.78 ; C6.1 2700.71,1548.35 v1(2700.71,1501.14) ; C4.2 2781.68,2095.32 2805.38,2071.61 cw(c2798.3,2064.55) 2808.3,2064.55 2808.3,2025.54 ccw(c2818.3,2025.58) v1(2810,2020) 2763.15,2020 2753.85,2010.69 2641.8,2010.69 cw(c2641.84,2020.69) 2637.71,2011.59 2637.71,2013.4 U1.35 2587.81,2013.4 U1.49 ; v1(2850,1690) 2896.97,1690 Q2.2 ; R15.1 v1@2870,3185 ; v1(2880,965) C27.1 C29.2 ; R12.1 3251.34,1628.03 3346.97,1628.03 3350,1625 3353.03,1628.03 J2.A1B12 3386.44,1628.03 3393.25,1621.22 3393.25,1597.4 J2.13 ; J2.B1A12 3386.44,1881.77 3393.25,1888.58 3393.25,1912.6 J2.14 ; R25.1 3404.76,880 v2(3454.01,830.76) ; C28.1 3467.7,967.07 cw(c3474.77,960) 3474.77,970 v1(3560,970) ; C25.2 C18.2
  Top Layer w20: v1(895,1845) 895.28,1844.72 895.28,1737.2 U3.1 ; v1(895.29,1635.29) 895.42,1635.42 895.42,1736.8 U3.1 ; v1(995,1740) 991.93,1736.93 U3.1
  other v1: 1935,1625 1835,1655 1800,1795 2135,1800 1835,1920 1940,1955 2601.43,3190.78 2870,3190.78
IPS_BLK: J8.8 U1.21 | length 822
  Top Layer w10: U1.21 2548.41,1742.88 2559,1732.29 2559,1723.02 2559.65,1719.16 cw(c2535,1715) 2559.95,1713.43 2559.28,1702.82 cw(c2549.3,1703.44) 2556.39,1696.39 2547.6,1687.6 ccw(c2554.71,1680.57) 2544.71,1680.61 2544.71,1033.68 J8.8
IPS_CS: J8.7 U1.14 | length 1020
  Top Layer w10: v1(2410,1725) 2410.61,1725.61 U1.14
  Bottom Layer w10: v1(2410,1725) 2247.89,1562.89 ccw(c2255,1555.86) 2245,1555.9 2245,1139.08 ccw(c2255,1139.14) 2247.88,1132.12 2307.11,1072.89 ccw(c2314.14,1080) 2314.08,1070 2408.39,1070 J8.7
IPS_DC: J8.6 U1.19 | length 846.5
  Top Layer w10: J8.6 2506.11,1114.5 ccw(c2499.01,1121.53) 2509.01,1121.53 U1.19
IPS_MOSI: J8.4 U1.17 | length 984.3
  Top Layer w10: J8.4 2297.93,1106.31 2418.69,1106.31 2469.71,1157.33 U1.17
IPS_RES: J8.5 U1.18 | length 904
  Top Layer w10: J8.5 2299.24,993.39 ccw(c2299.24,1003.39) 2306.29,996.29 2397.09,1087.09 cw(c2404.14,1080) 2404.1,1090 ; 2404.14,1090 2420.86,1090 ccw(c2420.86,1100) 2427.91,1092.91 2486.51,1151.51 ccw(c2479.41,1158.55) 2489.41,1158.55 U1.18
IPS_SCK: J8.3 U1.15 | length 1044.1
  Top Layer w10: J8.3 2221.61,1130 2395,1130 2430.31,1165.31 2430.31,1709.95 2435,1714.64 2435,1735.36 2430.31,1740.05 U1.15
L: J1.2 Q1.2 R18.1 R20.1 U2.2 | length 2895.6
  Top Layer w50: R18.1 457.44,635.51 615,793.07 Q1.2 611.01,1038.99 611.01,1100.92 467.44,1244.49 R20.1 467.44,1521.85 ccw(c417.44,1521.85) 452.87,1557.13 324.55,1685.45 cw(c360,1720.71) 310,1720.57 310,2079.29 cw(c360,2079.29) 324.64,2114.64 695.44,2485.44 ccw(c660,2520.71) 710,2520.71 U2.2 710,2842.56 925.59,3058.15 J1.2
N: J1.1 J9.1 U2.1 | length 1586.8
  Top Layer w50: J9.1 220,2144.39 cw(c270,2144.29) 234.56,2179.56 395.44,2340.44 ccw(c360,2375.71) 410,2375.71 U2.1 410,2843.72 374.41,2879.31 J1.1
NetC5_2: C5.2 U1.22 | length 133
  Top Layer w10: U1.22 2568.11,1745.81 2575,1738.92 2575,1729.64 2576,1728.64 2576,1660.69 C5.2
NetC10_1: C10.1 C11.1 C12.1 L1.2 X2.4 | length 327
  Top Layer w10: L1.2 1564.26,2145.94 C10.1 C12.1 1881.59,2145.94 X2.4
NetC14_2: C14.2 R7.1 | length 75.4
  Top Layer w10: C14.2 1115.94,1459.37 R7.1
NetC15_1: C15.1 R6.1 | length 75.1
  Top Layer w10: R6.1 524.69,1694.37 C15.1
NetC30_1: C30.1 J9.2 Q1.1 R23.2 | length 983.4
  Top Layer w50: J9.2 220,1297.9 456.72,1061.18 504.57,1061.18 515,1050.75 Q1.1 515,1019.25 450,954.25 450,812.44 R23.2 456.52,804.07 315.93,804.07 C30.1
NetC30_2: C30.2 R20.2 | length 423.9
  Top Layer w50: v3(615,1295) 715.08,1295 722.56,1287.52 R20.2
  Bottom Layer w50: C30.2 613.15,1296.85 v3(615,1295)
NetD1_A: D1.A R4.1 | length 116.3
  Top Layer w10: D1.A@1520,2864 1525.63,2858.37 R4.1
NetD2_A: D2.A R5.1 | length 109.3
  Top Layer w10: R5.1 1610,2750.63 D2.A
NetJ2_A5: J2.A5 J2.B5 R12.2 | length 325.9
  Top Layer w10: R12.2 3250.98,1690 3266.77,1705.79 J2.A5 3370.63,1706.69 3400.93,1706.69 3425.25,1731.01 3425.25,1798.67 3400.93,1822.99 3370.61,1822.99 J2.B5
NetJ3_1: J3.1 R9.1 U4.3 | length 528.1
  Top Layer w10: J3.1 R9.1 1510.98,1344.37 1590.02,1423.4 1740.52,1423.4 1813.93,1350 U4.3
NetQ1_3: Q1.3 R23.1 U6.4 | length 565.1
  Top Layer w50: R23.1 713.78,806.22 713.78,1033.39 Q1.3 718.99,1038.6 718.99,1068.99 U6.4
NetQ2_1: Q2.1 R19.2 | length 78.7
  Top Layer w10: R19.2 2975.08,1754.92 Q2.1
NetQ2_3: Q2.3 R22.1 | length 1814.8
  Top Layer w10: v1(2933.91,1557.98) 2935.79,1559.86 2935.79,1606.07 Q2.3
  Bottom Layer w10: R22.1 2397.28,840 2531.43,974.15 2531.43,982.34 cw(c2541.43,982.29) 2534.33,989.33 2535.85,990.85 ccw(c2528.75,997.89) 2538.71,997.06 cw(c2585,993.39) 2552.14,1026.19 2857.09,1331.14 ccw(c2850,1338.19) 2860,1338.19 2860,1479.93 cw(c2870,1479.93) 2862.93,1487 v1(2933.91,1557.98)
NetR3_1: R3.1 X2.3 | length 101.3
  Top Layer w10: X2.3 2077.77,2148.4 R3.1
NetR8_1: R8.1 U4.1 U4.2 U4.5 | length 434.8
  Top Layer w10: U4.5 1741.3,1400 1841.3,1300 U4.2 ; U4.1 U4.2 ; R8.1 1959.02,1380.63 1892.75,1314.37 1892.75,1306.84 1885.92,1300 U4.2
NetR11_1: R11.1 SW2.2 | length 431.5
  Top Layer w10: R11.1 2670,3041.2 ccw(c2680,3041.26) 2672.89,3034.23 2704.68,3002.45 ccw(c2711.68,3009.59) 2708.9,2999.98 2708.89,3006.1 2723.58,2983.54 SW2.2@2723.58,2676.46
NetR13_1: R13.1 R14.2 U4.6 | length 402.1
  Top Layer w10: U4.6 1630,1350 1600,1320 1600,1296.98 1621.37,1275.62 1686.18,1275.62 1707.54,1254.25 1707.54,1188.44 1740,1155.98 R14.2 R13.1
NetR16_1: R16.1 SW3.2 | length 427.4
  Top Layer w10: R16.1 2940,3042.12 2976.02,3006.1 2983.89,3006.1 2998.58,2991.42 2998.58,2983.54 SW3.2@2998.58,2676.46
NetR18_2: R18.2 U6.6 | length 636.8
  Top Layer w50: R18.2 835,605 930,700 U6.6
NetR21_1: R21.1 SW4.5 | length 581
  Top Layer w10: SW4.5 2990.63,376.57 3039.37,425.32 3039.37,822.55 3090.84,874.02 R21.1
NetR22_2: R22.2 U6.2 | length 455.1
  Bottom Layer w10: U6.2 1230,1179.14 ccw(c1240,1179.14) 1232.91,1172.09 1507.09,897.91 cw(c1500,890.86) 1510,890.9 ; R22.2 1510,890.86
NRST: C3.1 R1.1 SW1.1 U1.7 | length 1645.8
  Top Layer w10: v1(1580,1520) 1512.78,1520 1511.42,1521.36 1511.42,1828.44 1526.11,1843.13 1526.11,1861.46 1564.02,1899.37 R1.1 1634.69,1899.37 C3.1 ; v1(2320,1915) U1.7
  Bottom Layer w10: v1(1580,1520) 2035,1520 2130,1615 2245.86,1615 ccw(c2245.86,1625) 2252.91,1617.91 2347.11,1712.11 ccw(c2340,1719.14) 2350,1719.14 2350,1770 2320,1800 v1(2320,1915)
PWM_Heat: R19.1 U1.30 | length 355.3
  Top Layer w10: U1.30 2785.86,1915 cw(c2785.86,1905) 2792.89,1912.11 2890.83,1814.17 cw(c2883.74,1807.12) 2893.74,1807.16 ; 2893.74,1807.12 2893.74,1775.63 R19.1
SWCLK: J5.4 U1.37 | length 1094.9
  Top Layer w10: U1.37 2636.82,2060.6 2726.22,2150 2950,2150 3092.07,2292.07 cw(c3099.14,2285) 3099.14,2295 3290.86,2295 ccw(c3290.86,2305) 3297.93,2297.93 J5.4
SWDIO: J5.2 U1.34 | length 1017.2
  Top Layer w10: U1.34 2724.1,1993.7 2729.05,1988.76 2819.11,1988.76 3105,2274.64 3474.64,2274.64 J5.2
UART1_RX: J7.2 U1.31 | length 1360.2
  Top Layer w10: U1.31 2845.4,1934.6 v1(2875,1905)
  Bottom Layer w10: v1(2875,1905) 3225,2255 3225,2450 3272.91,2497.91 ; 3265.86,2495 ccw(c3265.86,2505) 3272.91,2497.91 ; J7.2 3272.91,2497.91
UART1_TX: J7.3 U1.42 | length 1522.2
  Top Layer w10: v1(2470,2305) 2470,2137.11 2509.01,2098.1 U1.42
  Bottom Layer w10: v1(2470,2305) 2975,2305 J7.3@3510,2840
UART_RX: J6.2 U1.13 | length 517
  Top Layer w10: J6.2 2390.91,1355.91 2390.91,1708.74 2385,1714.64 2385,1735.36 2390.91,1741.26 U1.13
UART_TX: J6.3 U1.12 | length 682.5
  Top Layer w10: J6.3 2288.57,1246.43 2288.57,1495.74 2310,1517.17 2310,1790 2336.3,1816.3 2363.2,1816.3 U1.12
USB_DM: J2.A7 J2.B7 U1.32 | length 879.2
  Top Layer w10: U1.32 2890.14,1954.3 3079.6,1764.84 3295,1764.84 ; J2.A7@3344.7,1764.84 3295,1764.84 ; J2.B7 3368.8,1726.38 3333.47,1726.38 3295,1764.84
USB_DP: J2.A6 J2.B6 U1.33 | length 896.2
  Top Layer w10: U1.33 2721.18,1974 2724.88,1970.3 2896.77,1970.3 3082.54,1784.53 3343.8,1784.53 J2.B6@3344.7,1783.62 ; J2.A6 3370.61,1746.06 3400.93,1746.06 3409.25,1754.38 3409.25,1775.3 3400.93,1783.62 3370.61,1783.62 J2.B6
VBAT: J4.1 U1.1 | length 434.9
  Top Layer w10: J4.1 2090,2344.14 ccw(c2100,2344.14) 2092.93,2337.07 2279.36,2150.64 cw(c2272.31,2143.55) 2281.68,2147.04 ccw(c2292.01,2150.83) 2288.17,2140.52 cw(c2284.73,2131.13) 2291.78,2138.22 2360.47,2069.53 cw(c2353.4,2062.46) 2363.4,2062.46 U1.1
XTAL_A: C8.1 R2.1 U1.5 X1.1 | length 575.5
  Top Layer w10: X1.1 2047,1886.06 C8.1 R2.1 2085.16,1825.16 2214.3,1954.3 2301.32,1954.3 2303.02,1956 2336.98,1956 2338.68,1954.3 U1.5
XTAL_B: C9.1 R2.2 U1.6 X1.2 | length 605.2
  Top Layer w10: X1.2 2047,1693.94 C9.1 R2.2 2055.98,1764.53 2226.05,1934.6 2304.24,1934.6 2309.64,1940 2330.36,1940 2335.76,1934.6 U1.6
XTAL_OUT: C7.1 R3.2 U1.3 | length 332.1
  Top Layer w10: R3.2 2145,2075.94 C7.1 2145.94,2074.02 2159.24,2060.71 2160.23,2060.71 2227.24,1993.7 U1.3
pads on no net: J1. J2. J2.A4B9 J2.A8 J2.B4A9 J2.B8 J4. J8. SW1. SW2. SW3. SW4. U1.2 U1.4 U1.16 U1.28 U1.29 U1.45 U1.46 U6.3 U6.5

## Polygon pours and split planes (outlines as drawn)
GND on GND (split plane): 3476.77,3434.61 3488.49,3433.46 3500.12,3431.54 3511.59,3428.86 3522.86,3425.44 3533.88,3421.3 3544.61,3416.43 3555,3410.88 3565,3404.66 3574.57,3397.8 3583.68,3390.33 3592.28,3382.28 3600.33,3373.68 3607.8,3364.57 3614.66,3355 3620.88,3345 3626.43,3334.61 3631.3,3323.88 3635.44,3312.86 3638.86,3301.59 3641.54,3290.12 3643.46,3278.49 3644.61,3266.77 3644.97,3255.71 3644.9,3255 3644.9,225 3644.97,224.29 3644.61,213.23 3643.46,201.51 3641.54,189.88 3638.86,178.41 3635.44,167.14 3631.3,156.12 3626.43,145.39 3620.88,135 3614.66,125 3607.8,115.43 3600.33,106.32 3592.28,97.72 3583.68,89.67 3574.57,82.2 3565,75.34 3555,69.12 3544.61,63.57 3533.88,58.7 3522.86,54.56 3511.59,51.14 3500.12,48.46 3488.49,46.54 3476.77,45.39 3465.71,45.03 3465,45.1 200,45.1 199.29,45.03 188.23,45.39 176.51,46.54 164.88,48.46 153.41,51.14 142.14,54.56 131.12,58.7 120.39,63.57 110,69.12 100,75.34 90.43,82.2 81.32,89.67 72.72,97.72 64.67,106.32 57.2,115.43 50.34,125 44.12,135 38.57,145.39 33.7,156.12 29.56,167.14 26.14,178.41 23.46,189.88 21.54,201.51 20.39,213.23 20.03,224.29 20.1,225 20.1,3255 20.03,3255.71 20.39,3266.77 21.54,3278.49 23.46,3290.12 26.14,3301.59 29.56,3312.86 33.7,3323.88 38.57,3334.61 44.12,3345 50.34,3355 57.2,3364.57 64.67,3373.68 72.72,3382.28 81.32,3390.33 90.43,3397.8 100,3404.66 110,3410.88 120.39,3416.43 131.12,3421.3 142.14,3425.44 153.41,3428.86 164.88,3431.54 176.51,3433.46 188.23,3434.61 199.29,3434.97 200,3434.9 3465,3434.9 3465.71,3434.97
+3.3V on VCC (split plane): 3476.77,3434.61 3488.49,3433.46 3500.12,3431.54 3511.59,3428.86 3522.86,3425.44 3533.88,3421.3 3544.61,3416.43 3555,3410.88 3565,3404.66 3574.57,3397.8 3583.68,3390.33 3592.28,3382.28 3600.33,3373.68 3607.8,3364.57 3614.66,3355 3620.88,3345 3626.43,3334.61 3631.3,3323.88 3635.44,3312.86 3638.86,3301.59 3641.54,3290.12 3643.46,3278.49 3644.61,3266.77 3644.97,3255.71 3644.9,3255 3644.9,225 3644.97,224.29 3644.61,213.23 3643.46,201.51 3641.54,189.88 3638.86,178.41 3635.44,167.14 3631.3,156.12 3626.43,145.39 3620.88,135 3614.66,125 3607.8,115.43 3600.33,106.32 3592.28,97.72 3583.68,89.67 3574.57,82.2 3565,75.34 3555,69.12 3544.61,63.57 3533.88,58.7 3522.86,54.56 3511.59,51.14 3500.12,48.46 3488.49,46.54 3476.77,45.39 3465.71,45.03 3465,45.1 200,45.1 199.29,45.03 188.23,45.39 176.51,46.54 164.88,48.46 153.41,51.14 142.14,54.56 131.12,58.7 120.39,63.57 110,69.12 100,75.34 90.43,82.2 81.32,89.67 72.72,97.72 64.67,106.32 57.2,115.43 50.34,125 44.12,135 38.57,145.39 33.7,156.12 29.56,167.14 26.14,178.41 23.46,189.88 21.54,201.51 20.39,213.23 20.03,224.29 20.1,225 20.1,3255 20.03,3255.71 20.39,3266.77 21.54,3278.49 23.46,3290.12 26.14,3301.59 29.56,3312.86 33.7,3323.88 38.57,3334.61 44.12,3345 50.34,3355 57.2,3364.57 64.67,3373.68 72.72,3382.28 81.32,3390.33 90.43,3397.8 100,3404.66 110,3410.88 120.39,3416.43 131.12,3421.3 142.14,3425.44 153.41,3428.86 164.88,3431.54 176.51,3433.46 188.23,3434.61 199.29,3434.97 200,3434.9 3465,3434.9 3465.71,3434.97

## Silkscreen, mask and mechanical layers (free items; w line width, h text height)
Top Overlay:
  drawing of 3173 lines, arcs and shapes, not listed
  text "Drawn By: 想学习的拾秋小菜鸡" at 2200,3278.78 h100
  text "高压危险" at 210,202.21 h300
Mechanical 15:
  the board outline again, w10
Drill Drawing:
  text ".Legend" at 4445,19.99 h60

## Text inside footprints (layer, text, board x,y; h text height)
J1: Top Overlay "POWER" at 510,3070 h60